# Altium PCB RT_SUPER_B1.PCBdoc (part 2 of 3)
Units mil, origin at the board's own origin, x right, y up, seen from the top; angles counter-clockwise.
Board outline 1617.06 x 1691.18 mil, 4 copper layers (Top Layer, GND, PWR, Bottom Layer), stack 39.556 mil thick; 138 components, 99 nets, 466 pads, 206 vias.
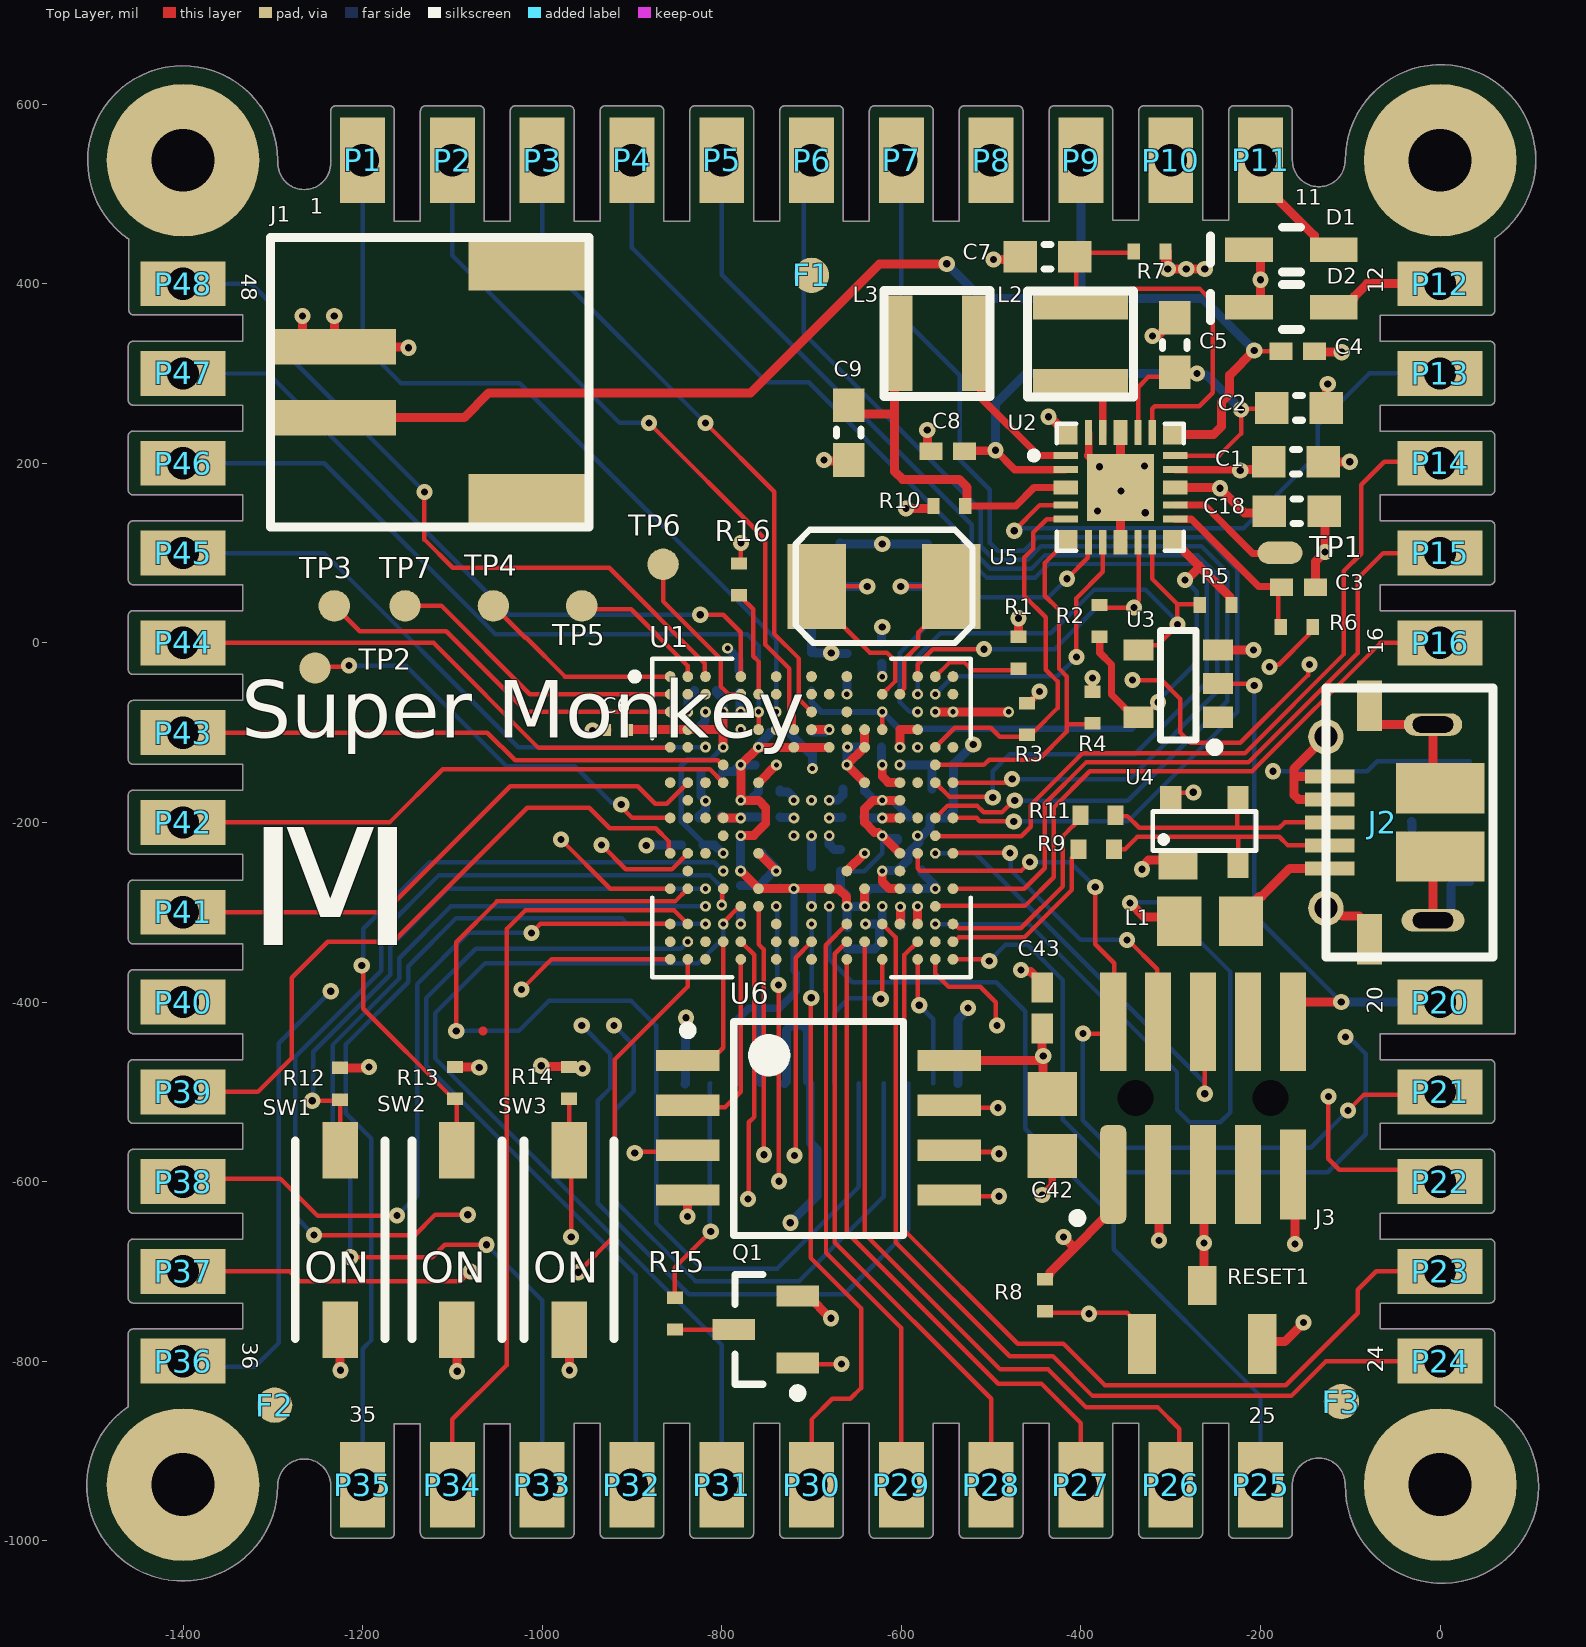
[diagram p0: Top Layer view]

## Part data (continued)
U2: "Power Management IC for Low-Power Microcontroller Applications 24-Pin HVQFN", Manufacturer="NXP Semiconductors", Supplier Part Number 1=771-PCA9420BSAZ, Check_prices=https://www.snapeda.com/parts/PCA9420BSAZ/NXP%20Semiconductors/view-part/5003095/?ref=eda, Manufacturer Part Number=PCA9420BSAZ, Pricing="1=3.09000, 10=2.78000, 50=2.63000, 100=2.28000, 1000=2.23000, 10000=2.20000 (USD)", RoHS=Yes, RoHS Compliant=Yes, SnapEDA_Link=https://www.snapeda.com/parts/PCA9420BSAZ/NXP%20Semiconductors/view-part/5003095/?ref=snap, Stock=953, Supplier 1=Mouser
U3: "IC BUFF NON-INVERT 2.7 V SOT23-5", Case/Package=SOT-23-5, High Level Output Current=9mA, Manufacturer="Texas Instruments", Max Operating Temperature=85°C, Max Supply Voltage=2.7V, Min Operating Temperature=-40°C, Min Supply Voltage=800mV, Package Quantity=3000, Quiescent Current=10uA, Supplier Part Number 1=296-12463-1-ND, Category="Buffers, Drivers and Transceivers", ComponentLink1Description=https://datasheet.ciiva.com/1833/sn74auc1g07-1833760.pdf?src-supplier=Digi-Key, ComponentLink1URL=https://datasheet.ciiva.com/1833/sn74auc1g07-1833760.pdf?src-supplier=Digi-Key, ComponentLink2Description=https://datasheet.ciiva.com/14302/sces373q-14302179.pdf?src-supplier=Avnet, ComponentLink2URL=https://datasheet.ciiva.com/14302/sces373q-14302179.pdf?src-supplier=Avnet, ComponentLink3Description=https://datasheet.ciiva.com/15094/getdatasheetpartid-69632-15094449.pdf?src-supplier=Verical, ComponentLink3URL=https://datasheet.ciiva.com/15094/getdatasheetpartid-69632-15094449.pdf?src-supplier=Verical, ComponentLink4Description=https://datasheet.ciiva.com/1833/sn74auc1g07-1833761.pdf?src-supplier=Digi-Key, ComponentLink4URL=https://datasheet.ciiva.com/1833/sn74auc1g07-1833761.pdf?src-supplier=Digi-Key, ComponentLink5Description=https://datasheet.ciiva.com/1833/sn74auc1g07-1833762.pdf?src-supplier=Digi-Key, ComponentLink5URL=https://datasheet.ciiva.com/1833/sn74auc1g07-1833762.pdf?src-supplier=Digi-Key, ComponentLink6Description=https://datasheet.ciiva.com/14302/sces373q-14302175.pdf?src-supplier=Avnet, ComponentLink6URL=https://datasheet.ciiva.com/14302/sces373q-14302175.pdf?src-supplier=Avnet, Lead Free="Lead Free", Logic Function=Buffer,Inverting, Low Level Output Current=9mA, Manufacturer Part Number=SN74AUC1G07DBVR, Mount="Surface Mount", Number of Bits=1, Number of Bits per Element=1, Number of Channels=1, Number of Elements=1, Number of Gates=1, Number of Input Lines=1, Number of Inputs=1, Number of Output Lines=1, Number of Outputs=1, Number of Pins=5, Packaging="Tape and Reel", Polarity=Non-Inverting, Pricing="1=0.41000, 10=0.32900, 25=0.30080, 100=0.22390, 250=0.20288, 500=0.16790, 1000=0.12593 (USD)", Propagation Delay=1.7ns, Radiation Hardening=No, REACH SVHC=Unknown, RoHS=Yes, RoHS Compliant=Yes, Series=74AUC, Stock=6487, Supplier 1=Digi-Key, Technology=CMOS, Turn-On Delay Time=3.3ns
U4: "TVS DIODE 5.5VWM SOT143B", Capacitance @ Frequency="1pF @ 1MHz", Current - Peak Pulse (10/1000µs)=-, Manufacturer="NXP Semiconductors", Operating Temperature="-40°C ~ 85°C (TA)", Package / Case="TO-253-4, TO-253AA", Power Line Protection=Yes, Supplier Device Package=SOT-143B, Supplier Part Number 1=568-4140-1-ND, Voltage - Breakdown (Min)=6V, Voltage - Reverse Standoff (Typ)="5.5V (Max)", Applications="General Purpose", Bidirectional Channels=2, Category="Circuit Protection", ComponentLink1Description=http://www.nxp.com/documents/data_sheet/PRTR5V0U2X.pdf, ComponentLink1URL=http://www.nxp.com/documents/data_sheet/PRTR5V0U2X.pdf, Manufacturer Part Number=PRTR5V0U2X,215, Mounting Type="Surface Mount", Packaging="Cut Tape (CT)", Power - Peak Pulse=-, Pricing="1=0.57, 10=0.477, 25=0.418, 100=0.3578, 250=0.31036, 500=0.26286, 1000=0.20265 (USD)", RoHS="RoHS Compliant", Stock=11734, Supplier 1=Digi-Key, Type="Steering (Rail to Rail)", Unidirectional Channels=-, Voltage - Clamping (Max) @ Ipp=-
U5: library part ABM3-24.000MHZ-B2-T, "CRYSTAL 24.000MHZ 18PF SMD", Frequency Stability=±50ppm, Frequency Tolerance=±20ppm, Load Capacitance=18pF, Manufacturer="Abracon Corporation", Operating Mode=Fundamental, Operating Temperature="-20°C ~ 70°C", Package / Case=2-SMD, Supplier Part Number 1=535-9106-1-ND, Category="Crystals and Oscillators", ComponentLink1Description=http://www.abracon.com/Resonators/abm3.pdf, ComponentLink1URL=http://www.abracon.com/Resonators/abm3.pdf, Frequency=24MHz, Height="0.051\" (1.30mm)", Manufacturer Part Number=ABM3-24.000MHZ-B2-T, Mounting Type="Surface Mount", Packaging="Cut Tape (CT)", Pricing 1="1=1.43, 10=1.235, 50=1.083, 100=0.855, 500=0.722 (USD)", RoHS="RoHS Compliant", Size / Dimension="0.197\" L x 0.126\" W (5.00mm x 3.20mm)", Stock 1=7349, Supplier 1=Digi-Key, Type="MHz Crystal"
U6: library part W25Q128JVSIM, "NOR Flash Serial (SPI, Dual SPI, Quad SPI) 3V/3.3V 128M-bit 16M x 8 6ns 8-Pin SOIC Tube", Case/Package=SOIC, Frequency=104MHz, Manufacturer=Winbond, Manufacturer Part Number=W25Q64JVSSIQ, Max Operating Temperature=85°C, Max Supply Voltage=3.6V, Min Operating Temperature=-40°C, Min Supply Voltage=2.7V, Operating Supply Voltage=3V, Supplier Part Number 1=W25Q128JVSIM-ND, Access Time=6ns, Address Bus Width=24b, Category=Flash, ComponentLink1Description=http://www.winbond.com/resource-files/w25q64jv%20spi%20revg%2012142016.pdf, ComponentLink1URL=http://www.winbond.com/resource-files/w25q64jv%20spi%20revg%2012142016.pdf, ComponentLink2Description=https://www.winbond.com/resource-files/w25q64jv%20spi%20%20%20revc%2006032016%20kms.pdf, ComponentLink2URL=https://www.winbond.com/resource-files/w25q64jv%20spi%20%20%20revc%2006032016%20kms.pdf, ComponentLink3Description=http://www.winbond.com/resource-files/w25q128jv_dtr%20revc%2003272018%20plus.pdf?src-supplier=Digi-Key, ComponentLink3URL=http://www.winbond.com/resource-files/w25q128jv_dtr%20revc%2003272018%20plus.pdf?src-supplier=Digi-Key, Density=64MB, Interface=SPI,Serial, Memory Size=128Mb, Memory Type=NOR,FLASH, Mount="Surface Mount", Packaging=Tray, Page Size=256B, Pricing 1="1=1.88000, 10=1.71400, 25=1.66760, 50=1.65880, 100=1.48280, 250=1.47852, 500=1.45618, 1000=1.39437, 5000=1.29820 (USD)", RoHS=Yes, RoHS Compliant=Yes, Stock 1=27539, Supplier 1=Digi-Key
U7: "1.54\" 240x240 IPS Display", Manufacturer="Buy Display", Manufacturer Part Number=ER-TFT1.54-1

## Free pads (board coordinates)
  round 170 hole 70: 2(-1400,-937.5) 2(-1400,537.5) 2(0,-937.5) 2(0,537.5)

## Via types
v1: diameter 18, hole 8, Top Layer to Bottom Layer, tented both sides, 133 vias
v2: diameter 12, hole 6, Top Layer to Bottom Layer, tented both sides, 73 vias

## Nets (pads, with @x,y where several pads share a name; then routed paths per layer and width w, separated by ;. In a path a pad name is that pad's centre, name@x,y a point inside that pad or via, vN(x,y) a via of type N, cw(c..) or ccw(c..) an arc to the next point about the centre after c; other vN are vias at no path point)
+1v8: C6.2 C36.2 C37.2 C38.2 C39.2 C40.2 C41.2 R10.2 U1.A13 U1.B11 U1.C4 U1.C16 U1.C17 U1.D2 U1.E4 U1.E15 U1.F13 U1.G14 U1.L4 U1.R15 | length 1636.5
  Top Layer w10: C6.2@-904,-97 -903.57,-96.57 U1.D2@-837.8,-96.57 -798.43,-96.57 ; v2(-798.43,-116.26) -798.43,-96.57 ; v2(-798.43,-76.89) -798.43,-96.57 ; v2(-621.26,-135.94) -621.26,-148.82 -614.83,-155.25 -601.96,-155.25 U1.G14@-601.57,-155.63 ; v1(-594.68,149.49) -569.09,149.49 R10.2@-566.14,152.44 ; U1.R15@-581.89,-311.39 v2(-581.89,-293.43) ; v2(-562.2,-76.89) v2(-542.52,-76.89) v2(-480.51,-76.89) v2@-480.13,-76.51
  PWR w10: v2(-798.43,-76.89) v2(-798.43,-116.26) -798.43,-142.57 -785,-156 -641.31,-156 v2(-621.26,-135.94) -621,-135.69 -621,-97.82 -623.23,-95.59 ; v2(-621.26,-37.52) -655.14,-37.52 -660.25,-42.62 -660.25,-56.82 v2(-660.63,-57.2) -660.25,-57.59 -660.25,-72.35 -637.01,-95.59 -623.23,-95.59 ; v1(-594.68,149.49) -588.78,149.49 -551.87,112.58 -551.87,-5.53 v2(-480.51,-76.89) ; v2(-581.89,-293.43) -581.89,-260.89 -573,-252 -541.86,-252 -536,-246.14 -536,-162.15 v2(-581.89,-116.26) -581.89,-96.57 -580.91,-95.59 ; v2(-542.52,-76.89) v2(-562.2,-76.89) -562.2,-89.73 -568.06,-95.59 -580.91,-95.59 ; -623.23,-95.59 -580.91,-95.59
  Bottom Layer w6: C40.2@-821,-225 -821,-223.03 -845,-199.03 -845,-136.86 -838.25,-130.11 -812.28,-130.11 v2(-798.43,-116.26)
  Bottom Layer w10: C40.2@-821,-225 -821,-225.16 -820.92,-225.24 -808.1,-225.24 -798.97,-234.37 v2(-798.43,-234.37) ; C38.2@-806.11,-53.27 -806.11,-55.08 -798.81,-62.38 -798.81,-76.51 v2(-798.43,-76.89) -798.43,-77.43 -800.51,-79.52 -800.51,-94.92 C39.2@-800.59,-95 ; v2@-660.53,-57.11 v2(-660.63,-57.2) -660.63,-35.9 -660.55,-35.82 C36.2@-660.43,-35.82 ; C41.2@-622,-116 -622,-134.66 -621.26,-135.4 v2(-621.26,-135.94) ; C37.2@-622,-22.94 -621.71,-22.94 -621.63,-23.02 -621.63,-37.15 v2(-621.26,-37.52)
+1v8_AO: C10.2 R2.2 R5.2 U1.C13 U1.D13 U2.12 U3.5 | length 866.2
  Top Layer w5: U1.D13@-621.26,-96.57 v2(-621.26,-76.89) ; R2.2@-379.13,6.77 R2.2@-379,6.64 ; U3.5@-340.75,-82.8 -330.91,-82.8 -314.32,-66.21 v1(-314.03,-66.21)
  Top Layer w8: R2.2@-379,6.64 -379,-11 -366,-24 -366,-57.54 U3.5@-340.75,-82.8
  Top Layer w10: U2.12@-296.93,114.15 -268.75,85.96 ; v1(-284,70) -282.45,70 -267.72,84.72 -234.17,51.17 -234.17,43.89 R5.2@-232.28,42
  Bottom Layer w5: v1@-315.85,-68.03 -312.2,-68.03 -314.85,-65.39 -271,-21.54 -271,57 v1(-284,70)
  Bottom Layer w7: C10.2@-700,-52.28 -700,-66 -689.11,-76.89 v2(-621.26,-76.89) -602.56,-95.59 -343.41,-95.59 v1@-315.85,-68.03